# Altium PCB PCB_表决器_2021-10-19.pcbdoc
Units mm, origin at the board's own origin, x right, y up, seen from the top; angles counter-clockwise.
Board outline 75.95 x 43.78 mm, 2 copper layers (Top Layer, Bottom Layer); 33 components, 36 nets, 150 pads, 17 vias.
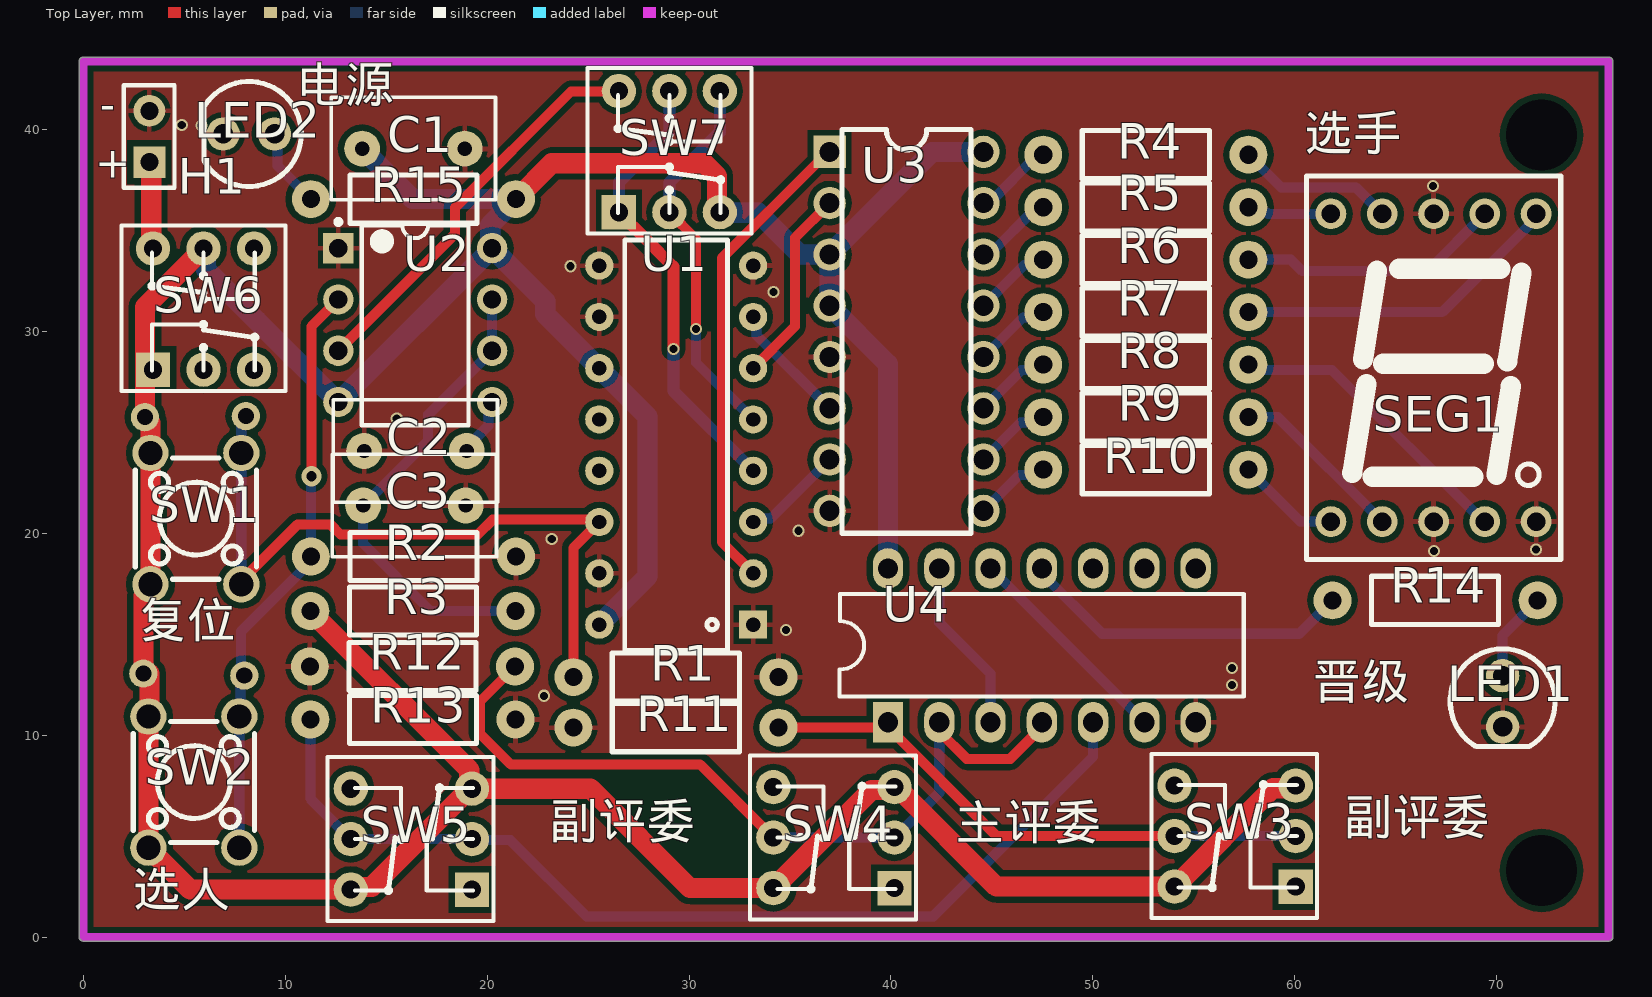
[diagram p0: Top Layer view]
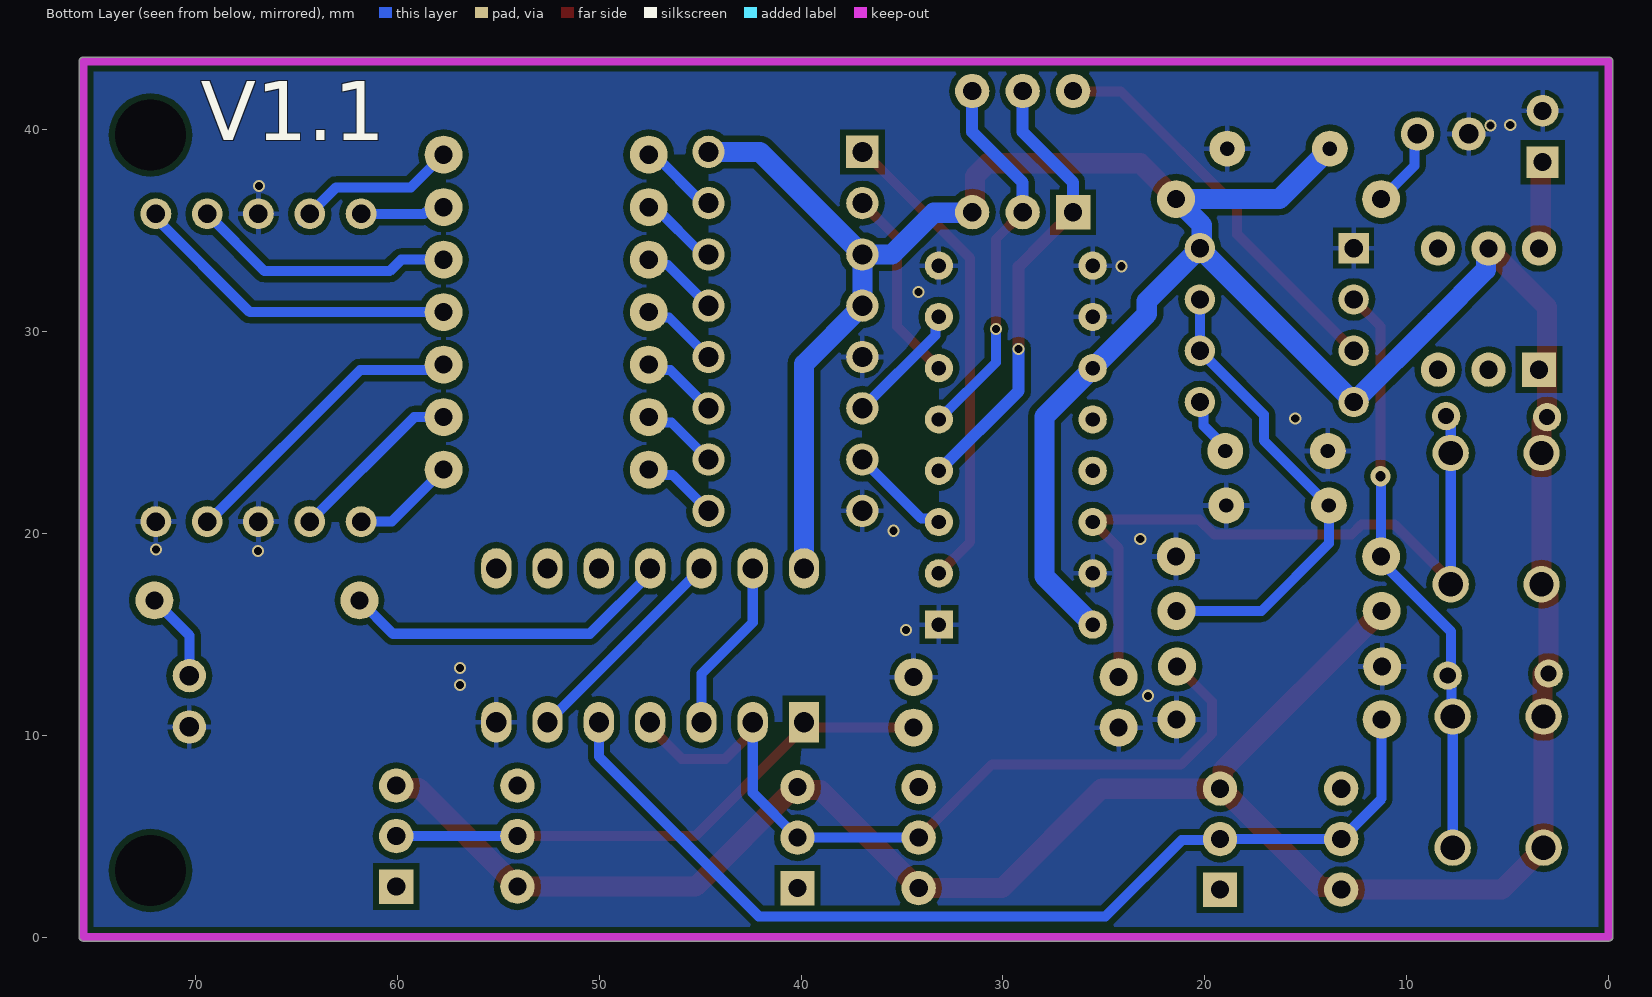
[diagram p1: Bottom Layer view, seen from below]

## Layer stack, top to bottom
Top Solder: solder mask 0.0102, Solder Resist, Dk 3.5
Top Layer: signal copper 0.0356
Dielectric1: dielectric 0.32, FR-4, Dk 4.8
Bottom Layer: signal copper 0.0356
Bottom Solder: solder mask 0.0102, Solder Resist, Dk 3.5

## Board outline
-0.2,0 -0.2,43.375 cw(c0,43.375) 0,43.575 75.55,43.575 cw(c75.55,43.375) 75.75,43.375 75.75,0 cw(c75.55,0) 75.55,-0.2 0,-0.2 cw(c0,0)

## Design rules (kind name [scope] priority, off if disabled: settings)
Clearance [All] p1: gap=0.3 ignorepadtopadclearanceinfootprint=TRUE except(0: Arc-Text Track-Text SMDPad-Text THPad-Text Via-Text Fill-Text Poly-Text Region-Text Text-Text Text-Hole)
ComponentClearance [All] p1 off: gap=0 collisioncheckmode=3 verticalgap=0 showdistances=FALSE
DiffPairsRouting [All] p1: maxlimit=0.254 minlimit=0.254 mostfreqgap=0.254 substack1={1671C4D1-2C51-4F67-87BD-DF8E1302070F} toplayer_{1671c4d1-2c51-4f67-87bd-df8e1302070f}_minwidth=0.381 toplayer_{1671c4d1-2c51-4f67-87bd-df8e1302070f}_maxwidth=0.381 toplayer_{1671c4d1-2c51-4f67-87bd-df8e1302070f}_prefwidth=0.381 bottomlayer_{1671c4d1-2c51-4f67-87bd-df8e1302070f}_minwidth=0.381 bottomlayer_{1671c4d1-2c51-4f67-87bd-df8e1302070f}_maxwidth=0.381 bottomlayer_{1671c4d1-2c51-4f67-87bd-df8e1302070f}_prefwidth=0.381 substack2={3B75E790-42CC-4F7A-B863-FC88317FD7D9} toplayer_{3b75e790-42cc-4f7a-b863-fc88317fd7d9}_minwidth=0.381 toplayer_{3b75e790-42cc-4f7a-b863-fc88317fd7d9}_maxwidth=0.381 toplayer_{3b75e790-42cc-4f7a-b863-fc88317fd7d9}_prefwidth=0.381 bottomlayer_{3b75e790-42cc-4f7a-b863-fc88317fd7d9}_minwidth=0.381 bottomlayer_{3b75e790-42cc-4f7a-b863-fc88317fd7d9}_maxwidth=0.381 bottomlayer_{3b75e790-42cc-4f7a-b863-fc88317fd7d9}_prefwidth=0.381 substack3={2F4237B4-239E-41A0-AF34-98E690AACAD4} toplayer_{2f4237b4-239e-41a0-af34-98e690aacad4}_minwidth=0.381 toplayer_{2f4237b4-239e-41a0-af34-98e690aacad4}_maxwidth=0.381 toplayer_{2f4237b4-239e-41a0-af34-98e690aacad4}_prefwidth=0.381 bottomlayer_{2f4237b4-239e-41a0-af34-98e690aacad4}_minwidth=0.381 bottomlayer_{2f4237b4-239e-41a0-af34-98e690aacad4}_maxwidth=0.381 bottomlayer_{2f4237b4-239e-41a0-af34-98e690aacad4}_prefwidth=0.381 substack4={1E66B78F-233F-4AC1-99FE-9E25E5123E1D} toplayer_{1e66b78f-233f-4ac1-99fe-9e25e5123e1d}_minwidth=0.381 toplayer_{1e66b78f-233f-4ac1-99fe-9e25e5123e1d}_maxwidth=0.381 toplayer_{1e66b78f-233f-4ac1-99fe-9e25e5123e1d}_prefwidth=0.381 bottomlayer_{1e66b78f-233f-4ac1-99fe-9e25e5123e1d}_minwidth=0.381 bottomlayer_{1e66b78f-233f-4ac1-99fe-9e25e5123e1d}_maxwidth=0.381 bottomlayer_{1e66b78f-233f-4ac1-99fe-9e25e5123e1d}_prefwidth=0.381 substack5={4320813C-2743-4AF9-94FB-DAB81B7D91AB} toplayer_{4320813c-2743-4af9-94fb-dab81b7d91ab}_minwidth=0.381 toplayer_{4320813c-2743-4af9-94fb-dab81b7d91ab}_maxwidth=0.381 toplayer_{4320813c-2743-4af9-94fb-dab81b7d91ab}_prefwidth=0.381 bottomlayer_{4320813c-2743-4af9-94fb-dab81b7d91ab}_minwidth=0.381 bottomlayer_{4320813c-2743-4af9-94fb-dab81b7d91ab}_maxwidth=0.381 bottomlayer_{4320813c-2743-4af9-94fb-dab81b7d91ab}_prefwidth=0.381 substack6={9AE5D4F9-CAB0-47CD-A39F-EDF1D98A47D7} toplayer_{9ae5d4f9-cab0-47cd-a39f-edf1d98a47d7}_minwidth=0.381 toplayer_{9ae5d4f9-cab0-47cd-a39f-edf1d98a47d7}_maxwidth=0.381 toplayer_{9ae5d4f9-cab0-47cd-a39f-edf1d98a47d7}_prefwidth=0.381 bottomlayer_{9ae5d4f9-cab0-47cd-a39f-edf1d98a47d7}_minwidth=0.381 bottomlayer_{9ae5d4f9-cab0-47cd-a39f-edf1d98a47d7}_maxwidth=0.381 bottomlayer_{9ae5d4f9-cab0-47cd-a39f-edf1d98a47d7}_prefwidth=0.381 toplayer_minwidth=0.381 toplayer_maxwidth=0.381 toplayer_prefwidth=0.381 bottomlayer_minwidth=0.381 bottomlayer_maxwidth=0.381 bottomlayer_prefwidth=0.381 substack7={C643A821-3D00-4CAF-8DDB-CDB80088F83D} toplayer_{c643a821-3d00-4caf-8ddb-cdb80088f83d}_minwidth=0.381 toplayer_{c643a821-3d00-4caf-8ddb-cdb80088f83d}_maxwidth=0.381 toplayer_{c643a821-3d00-4caf-8ddb-cdb80088f83d}_prefwidth=0.381 bottomlayer_{c643a821-3d00-4caf-8ddb-cdb80088f83d}_minwidth=0.381 bottomlayer_{c643a821-3d00-4caf-8ddb-cdb80088f83d}_maxwidth=0.381 bottomlayer_{c643a821-3d00-4caf-8ddb-cdb80088f83d}_prefwidth=0.381 substack8={C7AC0887-D30A-4DD7-9CA0-6FC6CFBC5628} toplayer_{c7ac0887-d30a-4dd7-9ca0-6fc6cfbc5628}_minwidth=0.381 toplayer_{c7ac0887-d30a-4dd7-9ca0-6fc6cfbc5628}_maxwidth=0.381 toplayer_{c7ac0887-d30a-4dd7-9ca0-6fc6cfbc5628}_prefwidth=0.381 bottomlayer_{c7ac0887-d30a-4dd7-9ca0-6fc6cfbc5628}_minwidth=0.381 bottomlayer_{c7ac0887-d30a-4dd7-9ca0-6fc6cfbc5628}_maxwidth=0.381 bottomlayer_{c7ac0887-d30a-4dd7-9ca0-6fc6cfbc5628}_prefwidth=0.381 substack9={87871970-CB08-4CB0-9993-037F3F7CD02E} toplayer_{87871970-cb08-4cb0-9993-037f3f7cd02e}_minwidth=0.381 toplayer_{87871970-cb08-4cb0-9993-037f3f7cd02e}_maxwidth=0.381 toplayer_{87871970-cb08-4cb0-9993-037f3f7cd02e}_prefwidth=0.381 bottomlayer_{87871970-cb08-4cb0-9993-037f3f7cd02e}_minwidth=0.381 bottomlayer_{87871970-cb08-4cb0-9993-037f3f7cd02e}_maxwidth=0.381 bottomlayer_{87871970-cb08-4cb0-9993-037f3f7cd02e}_prefwidth=0.381 substack10={5CED394E-343A-4A85-9D27-82AA802709EA} toplayer_{5ced394e-343a-4a85-9d27-82aa802709ea}_minwidth=0.381 toplayer_{5ced394e-343a-4a85-9d27-82aa802709ea}_maxwidth=0.381 toplayer_{5ced394e-343a-4a85-9d27-82aa802709ea}_prefwidth=0.381 bottomlayer_{5ced394e-343a-4a85-9d27-82aa802709ea}_minwidth=0.381 bottomlayer_{5ced394e-343a-4a85-9d27-82aa802709ea}_maxwidth=0.381 bottomlayer_{5ced394e-343a-4a85-9d27-82aa802709ea}_prefwidth=0.381 substack11={499D0663-916B-45B2-BDAF-5901DE3DF95E} toplayer_{499d0663-916b-45b2-bdaf-5901de3df95e}_minwidth=0.381 toplayer_{499d0663-916b-45b2-bdaf-5901de3df95e}_maxwidth=0.381 toplayer_{499d0663-916b-45b2-bdaf-5901de3df95e}_prefwidth=0.381 bottomlayer_{499d0663-916b-45b2-bdaf-5901de3df95e}_minwidth=0.381 bottomlayer_{499d0663-916b-45b2-bdaf-5901de3df95e}_maxwidth=0.381 bottomlayer_{499d0663-916b-45b2-bdaf-5901de3df95e}_prefwidth=0.381 substack12={DA8F04F5-34BF-456D-89EF-AED1E50DEB93} toplayer_{da8f04f5-34bf-456d-89ef-aed1e50deb93}_minwidth=0.381 toplayer_{da8f04f5-34bf-456d-89ef-aed1e50deb93}_maxwidth=0.381 toplayer_{da8f04f5-34bf-456d-89ef-aed1e50deb93}_prefwidth=0.381 bottomlayer_{da8f04f5-34bf-456d-89ef-aed1e50deb93}_minwidth=0.381 bottomlayer_{da8f04f5-34bf-456d-89ef-aed1e50deb93}_maxwidth=0.381 bottomlayer_{da8f04f5-34bf-456d-89ef-aed1e50deb93}_prefwidth=0.381 substack13={39F8033D-79E3-49DE-B103-996B2E850A14} toplayer_{39f8033d-79e3-49de-b103-996b2e850a14}_minwidth=0.381 toplayer_{39f8033d-79e3-49de-b103-996b2e850a14}_maxwidth=0.381 toplayer_{39f8033d-79e3-49de-b103-996b2e850a14}_prefwidth=0.381 bottomlayer_{39f8033d-79e3-49de-b103-996b2e850a14}_minwidth=0.381 bottomlayer_{39f8033d-79e3-49de-b103-996b2e850a14}_maxwidth=0.381 bottomlayer_{39f8033d-79e3-49de-b103-996b2e850a14}_prefwidth=0.381 substack14={68F1C6FC-B40A-4A37-B771-068DD1207AC1} toplayer_{68f1c6fc-b40a-4a37-b771-068dd1207ac1}_minwidth=0.381 toplayer_{68f1c6fc-b40a-4a37-b771-068dd1207ac1}_maxwidth=0.381 toplayer_{68f1c6fc-b40a-4a37-b771-068dd1207ac1}_prefwidth=0.381 bottomlayer_{68f1c6fc-b40a-4a37-b771-068dd1207ac1}_minwidth=0.381 bottomlayer_{68f1c6fc-b40a-4a37-b771-068dd1207ac1}_maxwidth=0.381 bottomlayer_{68f1c6fc-b40a-4a37-b771-068dd1207ac1}_prefwidth=0.381 substack15={08D4F847-0E3E-4780-9B1D-D9A1F908246D} toplayer_{08d4f847-0e3e-4780-9b1d-d9a1f908246d}_minwidth=0.381 toplayer_{08d4f847-0e3e-4780-9b1d-d9a1f908246d}_maxwidth=0.381 toplayer_{08d4f847-0e3e-4780-9b1d-d9a1f908246d}_prefwidth=0.381 bottomlayer_{08d4f847-0e3e-4780-9b1d-d9a1f908246d}_minwidth=0.381 bottomlayer_{08d4f847-0e3e-4780-9b1d-d9a1f908246d}_maxwidth=0.381 bottomlayer_{08d4f847-0e3e-4780-9b1d-d9a1f908246d}_prefwidth=0.381 substack16={5F9F11DE-8F00-4DF3-B7FC-A4F24491A138} toplayer_{5f9f11de-8f00-4df3-b7fc-a4f24491a138}_minwidth=0.381 toplayer_{5f9f11de-8f00-4df3-b7fc-a4f24491a138}_maxwidth=0.381 toplayer_{5f9f11de-8f00-4df3-b7fc-a4f24491a138}_prefwidth=0.381 bottomlayer_{5f9f11de-8f00-4df3-b7fc-a4f24491a138}_minwidth=0.381 bottomlayer_{5f9f11de-8f00-4df3-b7fc-a4f24491a138}_maxwidth=0.381 bottomlayer_{5f9f11de-8f00-4df3-b7fc-a4f24491a138}_prefwidth=0.381 substack17={66F0545B-EEFD-4E47-AE11-124B7897395C} toplayer_{66f0545b-eefd-4e47-ae11-124b7897395c}_minwidth=0.381 toplayer_{66f0545b-eefd-4e47-ae11-124b7897395c}_maxwidth=0.381 toplayer_{66f0545b-eefd-4e47-ae11-124b7897395c}_prefwidth=0.381 bottomlayer_{66f0545b-eefd-4e47-ae11-124b7897395c}_minwidth=0.381 bottomlayer_{66f0545b-eefd-4e47-ae11-124b7897395c}_maxwidth=0.381 bottomlayer_{66f0545b-eefd-4e47-ae11-124b7897395c}_prefwidth=0.381 substack18={E99DB6DF-13F7-4D84-9436-A55681B3F58B} toplayer_{e99db6df-13f7-4d84-9436-a55681b3f58b}_minwidth=0.381 toplayer_{e99db6df-13f7-4d84-9436-a55681b3f58b}_maxwidth=0.381 toplayer_{e99db6df-13f7-4d84-9436-a55681b3f58b}_prefwidth=0.381 bottomlayer_{e99db6df-13f7-4d84-9436-a55681b3f58b}_minwidth=0.381 bottomlayer_{e99db6df-13f7-4d84-9436-a55681b3f58b}_maxwidth=0.381 bottomlayer_{e99db6df-13f7-4d84-9436-a55681b3f58b}_prefwidth=0.381 maxuncoupledlength=12.7
Height [All] p1 off: minheight=0 maxheight=25.4 prefheight=12.7
PolygonConnect [All] p1: thpad.connectstyle=Relief thpad.reliefconductorwidth=0.254 thpad.reliefentries=4 thpad.polygonreliefangle="90 Angle" thpad.airgapwidth=0.254 smdpad.connectstyle=Relief smdpad.reliefconductorwidth=0.254 smdpad.reliefentries=4 smdpad.polygonreliefangle="90 Angle" smdpad.airgapwidth=0.254 via.connectstyle=Direct via.reliefconductorwidth=0.254 via.reliefentries=4 via.polygonreliefangle="90 Angle" via.airgapwidth=0.254
RoutingVias [All] p1: holewidth=0.5 width=0.6 viastyle="Through Hole" minholewidth=0.3 minwidth=0.3 maxholewidth=1 maxwidth=1
SolderMaskExpansion [All] p1: expansion=0.102 istentingtop=FALSE
Width [All] p1: maxlimit=2 minlimit=0.3 preferedwidth=1 substack1={1671C4D1-2C51-4F67-87BD-DF8E1302070F} substack2={3B75E790-42CC-4F7A-B863-FC88317FD7D9} substack3={2F4237B4-239E-41A0-AF34-98E690AACAD4} substack4={1E66B78F-233F-4AC1-99FE-9E25E5123E1D} substack5={4320813C-2743-4AF9-94FB-DAB81B7D91AB} substack6={9AE5D4F9-CAB0-47CD-A39F-EDF1D98A47D7} substack7={C643A821-3D00-4CAF-8DDB-CDB80088F83D} substack8={C7AC0887-D30A-4DD7-9CA0-6FC6CFBC5628} substack9={87871970-CB08-4CB0-9993-037F3F7CD02E} substack10={5CED394E-343A-4A85-9D27-82AA802709EA} substack11={499D0663-916B-45B2-BDAF-5901DE3DF95E} substack12={DA8F04F5-34BF-456D-89EF-AED1E50DEB93} substack13={39F8033D-79E3-49DE-B103-996B2E850A14} substack14={68F1C6FC-B40A-4A37-B771-068DD1207AC1} substack15={08D4F847-0E3E-4780-9B1D-D9A1F908246D} substack16={5F9F11DE-8F00-4DF3-B7FC-A4F24491A138} substack17={66F0545B-EEFD-4E47-AE11-124B7897395C} substack18={E99DB6DF-13F7-4D84-9436-A55681B3F58B}
27 further rules are at their usual default settings.

## Classes and differential pairs
component class Sheet_1_2021-10-25: C2 C3 H1 LED1 LED2 R1 R2 R3 R4 R5 R6 R7 R8 R9 R10 R11 R12 R13 R14 R15 SEG1 SW2 SW3 SW5 SW6 U1 U2 U3 U4

## Components (designator, comment, footprint, x,y, rotation, side; value= is the part's Value field where it differs from the comment)
C1 "104" RAD-0.2 16.35,39.05 r0 top (schematic designator C3)
C2 "104" RAD-0.2 16.45,24.075 r180 top
C3 "104" RAD-0.2 16.4,21.375 r0 top
H1 "HDR-F-2.54_1x2" HDR-F-2.54_1X2 3.275,39.65 r90 top
LED1 "LED-TH-5mm_R" LED-TH_BD5.0_RED 70.3,11.675 r0 top
LED2 "LED-TH-5mm_R" LED-TH_BD5.0_RED 8.2,39.775 r270 top (schematic designator LED1)
R1 "220" R_AXIAL-0.4 29.35,12.875 r0 top
R2 "10k" R_AXIAL-0.4 16.35,18.85 r180 top
R3 "10k" R_AXIAL-0.4 16.325,16.15 r0 top
R4 "220" R_AXIAL-0.4 52.625,38.75 r0 top
R5 "220" R_AXIAL-0.4 52.625,36.15 r0 top
R6 "220" R_AXIAL-0.4 52.625,33.55 r0 top
R7 "220" R_AXIAL-0.4 52.625,30.95 r0 top
R8 "220" R_AXIAL-0.4 52.625,28.35 r0 top
R9 "220" R_AXIAL-0.4 52.625,25.75 r0 top
R10 "220" R_AXIAL-0.4 52.625,23.15 r0 top
R11 "220" R_AXIAL-0.4 29.35,10.375 r0 top
R12 "220" R_AXIAL-0.4 16.3,13.4 r0 top
R13 "220" R_AXIAL-0.4 16.325,10.775 r180 top
R14 "220" R_AXIAL-0.4 66.95,16.675 r180 top
R15 "220" R_AXIAL-0.4 16.35,36.55 r0 top (schematic designator R4)
SEG1 "SEG-TH_0.56×1_Anode" LED-SEG-TH_10P-L12.6-W19.0-P2.54-S15.24-BL 66.875,28.2 r0 top
SW1 "复位" SW-TH_4P-L6.0-W6.0-P4.50-LS6.5 5.575,20.725 r90 top
SW2 "选择选手" SW-TH_4P-L6.0-W6.0-P4.50-LS6.5 5.475,7.675 r90 top
SW3 "副评委" "KFT DIP-8X8" 57.05,5 r90 top
SW4 "主评委" "KFT DIP-8X8" 37.175,4.925 r90 top
SW5 "副评委" "KFT DIP-8X8" 16.25,4.85 r90 top
SW6 "Comment" "KFT DIP-8X8" 5.95,31.1 r0 top
SW7 "Comment" "KFT DIP-8X8" 29.025,38.9 r0 top
U1 "HD74HC192P" DIP16 29.365,24.365 r90 top
U2 "NE555P" DIP-8_L9.8-W6.6-P2.54-LS7.6-BL 16.44,30.31 r270 top
U3 "CD4511BE" DIP-16_L19.8-W6.5-P2.54-LS7.6-BL 40.775,30 r270 top
U4 "XD74LS00" DIP-14_L20.0-W7.6-P2.54-LS7.6-BL 47.475,14.45 r0 top

## Footprints (in the part's own frame and the unit in brackets; to place one, negate y for a bottom-side part, rotate by r counter-clockwise, add the part's x,y. Pads: shape width x height; smd on the part's side, far side on the other; paste and mask are expansions set on the pad)
DIP16 [mil]
  rect 55x55 hole 28: 1(-350,-150)
  round 55 hole 28: 2(-250,-150) 3(-150,-150) 4(-50,-150) 5(50,-150) 6(150,-150) 7(250,-150) 8(350,-150) 9(350,150) 10(250,150) 11(150,150) 12(50,150) 13(-50,150) 14(-150,150) 15(-250,150) 16(-350,150)
  silkscreen extent -400,-100 400,100
DIP-8_L9.8-W6.6-P2.54-LS7.6-BL [mm]
  rect 1.5x1.5 hole 0.9: 1(-3.81,-3.81)
  round 1.5 hole 0.9: 2(-1.27,-3.81) 3(1.27,-3.81) 4(3.81,-3.81) 5(3.81,3.81) 6(1.27,3.81) 7(-1.27,3.81) 8(-3.81,3.81)
  silkscreen extent -5.23,-3.93 4.96,2.65
DIP-14_L20.0-W7.6-P2.54-LS7.6-BL [mm]
  rect 1.5x2 hole 1: 1(-7.62,-3.81)
  oval 1.5x2 hole 1: 2(-5.08,-3.81) 3(-2.54,-3.81) 4(0,-3.81) 5(2.54,-3.81) 6(5.08,-3.81) 7(7.62,-3.81) 8(7.62,3.81) 9(5.08,3.81) 10(2.54,3.81) 11(0,3.81) 12(-2.54,3.81) 13(-5.08,3.81) 14(-7.62,3.81)
  silkscreen extent -10.03,-2.53 10,2.54
DIP-16_L19.8-W6.5-P2.54-LS7.6-BL [mm]
  rect 1.6x1.6 hole 1: 1(-8.89,-3.81)
  round 1.6 hole 1: 2(-6.35,-3.81) 3(-3.81,-3.81) 4(-1.27,-3.81) 5(1.27,-3.81) 6(3.81,-3.81) 7(6.35,-3.81) 8(8.89,-3.81) 9(8.89,3.81) 10(6.35,3.81) 11(3.81,3.81) 12(1.27,3.81) 13(-1.27,3.81) 14(-3.81,3.81) 15(-6.35,3.81) 16(-8.89,3.81)
  silkscreen extent -10,-3.2 10,3.2
HDR-F-2.54_1X2 [mil]
  rect 62x62 hole 35: 1(-50,0)
  round 62 hole 35: 2(50,0)
  silkscreen extent -100,-49 100,50
"KFT DIP-8X8" [mm] "自锁开关，规格：8*8mm"
  rect 1.7x1.7 hole 0.9: 1(-2.5,-3)
  round 1.7 hole 0.9: 2(0,-3) 3(2.5,-3) 4(2.5,3) 5(0,3) 6(-2.5,3)
  silkscreen extent -4.06,-4.06 4.06,4.15, body extent -3.95,-3.95 4.05,4.05, height 13.1
LED-SEG-TH_10P-L12.6-W19.0-P2.54-S15.24-BL [mil]
  round 60 hole 36: 1(-200,-300) 2(-100,-300) 3(0,-300) 4(100,-300) 5(200,-300) 6(200,300) 7(100,300) 8(0,300) 9(-100,300) 10(-200,300)
  silkscreen extent -248,-374 248,374
LED-TH_BD5.0_RED [mil]
  round 65 hole 38: 1(0,50) 2(0,-50)
  silkscreen extent -102,-88 102,102
R_AXIAL-0.4 [mil]
  round 74 hole 35.4: 1(-200,0) 2(200,0)
  silkscreen extent -124,-47 124,47
RAD-0.2 [mil]
  round 70 hole 28: 1(100,0) 2(-100,0)
  silkscreen extent -160,-100 160,100
SW-TH_4P-L6.0-W6.0-P4.50-LS6.5 [mm]
  round 1.8 hole 1.2: 1(-3.25,2.25) 2(3.25,2.25) 3(-3.25,-2.25) 4(3.25,-2.25)
  silkscreen extent -3,-3 3,3

## Part data
C1 C3: library part 103

## Free pads (board coordinates)
  round 0.1 hole 3.5: 17(72.225,3.3) 18(72.225,39.725)
  round 1.4 hole 0.8: ""(2.975,13.05) ""(3.05,25.75) ""(7.975,12.95) ""(8.05,25.8)

## Via types
v1: diameter 0.6, hole 0.4, Top Layer to Bottom Layer, 16 vias
v2: diameter 1, hole 0.5, Top Layer to Bottom Layer, 1 vias

## Nets (pads, with @x,y where several pads share a name; then routed paths per layer and width w, separated by ;. In a path a pad name is that pad's centre, name@x,y a point inside that pad or via, vN(x,y) a via of type N, cw(c..) or ccw(c..) an arc to the next point about the centre after c; other vN are vias at no path point)
+5V: C1.2 pad.@2.975,13.05 pad.@3.05,25.75 R3.1 R15.2 SW1.1 SW1.2 SW2.1 SW2.2 SW3.3 SW3.6 SW4.3 SW4.6 SW5.3 SW5.6 SW6.5 SW7.3 U1.11 U1.16 U2.4 U2.8 U3.3 U3.4 U3.16 U4.14 | length 212.1
  Top Layer w1: pad.@2.975,13.05 3.16,13.05 2.975,13.235 2.975,16.909 3.325,17.259 SW1.1 ; pad.@3.05,25.75 3.05,31.2 SW6.5 ; pad.@3.275,13.05 3.275,10.975 SW2.2 SW2.1 5.3,2.35 SW5.6 13.384,2.484 14.284,2.484 19.15,7.35 SW5.3 ; SW1.1@3.325,17.675 SW1.2 pad.@3.325,25.475 ; R3.1 19.116,8.279 19.116,7.484 SW5.3 ; R15.2 23.205,38.325 30.75,38.325 31.391,37.684 31.391,36.034 SW7.3 ; SW3.3 59.916,7.366 58.916,7.366 SW3.6 45.225,2.5 40.3,7.425 SW4.3 40.041,7.291 39.041,7.291 SW4.6 30.05,2.425 25.125,7.35 SW5.3
  Bottom Layer w1: SW6.5 6.084,33.966 6.084,33.046 8.6,30.53 U2.4 U2.8 ; C1.2 16.31,36.55 R15.2 20.154,35.274 20.154,34.216 U2.8 ; U1.16 27.95,17.87 27.95,25.78 U1.11 22.875,30.855 22.875,31.495 U2.8 ; SW7.3 31.55,35.875 33.425,35.875 35.49,33.81 U3.3 ; U4.14 39.855,28.381 U3.4 U3.3 ; U3.16 42.045,38.89 U3.3
C2_2: C2.2 U2.5 | length 2.9
  Bottom Layer w0.5: C2.2 18.99,24.256 20.059,25.324 20.059,26.309 U2.5
GND: C1.1 C2.1 C3.1 H1.2 LED1.2 LED2.2 R1.2 R2.1 R11.1 R12.1 R13.1 SEG1.3 SEG1.5 SEG1.8 U1.1 U1.8 U1.9 U1.10 U1.15 U2.1 U3.5 U3.8 U4.7
  other v1: 22.825,11.95 56.9,12.475 56.9,13.325 34.8,15.2 66.9,19.125 71.95,19.2 23.2,19.725 35.425,20.125 15.525,25.675 34.175,31.95 24.125,33.225 66.85,37.2 5.85,40.2 4.875,40.225
NetR15: LED2.1 R15.1 | length 4
  Bottom Layer w0.5: LED2.1 9.621,39.624 9.621,38.2 R15.1
OUT: U2.3 | length 20
  Top Layer w0.5: U2.3 18.4,34.81 18.4,36.125 24.15,41.875 26.55,41.875
R1_1: pad.@8.05,25.8 R1.1 SW1.3 SW1.4 U1.14 | length 36.2
  Top Layer w0.5: SW1.3 7.825,17.65 10.6,20.425 12.25,20.425 12.739,19.936 19.536,19.936 20.275,20.675 25.435,20.675 U1.14 24.27,19.27 R1.1
  Bottom Layer w0.5: SW1.3 SW1.4 pad.@7.825,25.8
R2_2: pad.@7.975,12.95 R2.2 SW2.3 SW2.4 U2.2 | length 29.2
  Top Layer w0.5: v2(11.3,22.825) 11.3,30.25 U2.2
  Bottom Layer w0.5: SW2.3 SW2.4 7.776,10.976 7.776,12.508 7.803,12.534 7.803,12.872 7.725,12.95 7.803,13.028 7.803,15.128 11.27,18.595 R2.2 ; R2.2@11.285,18.865 11.285,22.81 v2(11.3,22.825)
R3_2: C3.2 R3.2 U2.6 U2.7 | length 23.7
  Bottom Layer w0.5: U2.7 U2.6 17.082,25.872 17.082,24.597 C3.2 13.86,19.49 17.2,16.15 R3.2
R4_1: R4.1 U3.15 | length 4
  Bottom Layer w0.5: U3.15 44.865,36.35 47.265,38.75 R4.1
R4_2: R4.2 SEG1.9 | length 8.4
  Bottom Layer w0.5: R4.2 59.323,37.132 63.023,37.132 63.667,36.488 SEG1.9@64.706,35.449
R5_1: R5.1 U3.14 | length 3.9
  Bottom Layer w0.5: U3.14 44.883,33.81 47.222,36.15 R5.1
R5_2: R5.2 SEG1.10 | length 4.2
  Bottom Layer w0.5: R5.2 57.969,35.886 58.622,35.886 58.688,35.82 SEG1.10
R6_1: R6.1 U3.13 | length 3.9
  Bottom Layer w0.5: U3.13 46.601,33.286 47.281,33.286 R6.1
R6_2: R6.2 SEG1.7 | length 13.1
  Bottom Layer w0.5: R6.2 59.81,33.55 60.377,32.983 66.578,32.983 SEG1.7
R7_1: R7.1 U3.12 | length 3.9
  Bottom Layer w0.5: U3.12 46.541,30.686 47.281,30.686 R7.1
R7_2: R7.2 SEG1.6 | length 16.3
  Bottom Layer w0.5: R7.2 67.3,30.95 SEG1.6@72.062,35.712
R8_1: R8.1 U3.11 | length 3.9
  Bottom Layer w0.5: U3.11 46.481,28.086 47.281,28.086 R8.1
R8_2: R8.2 SEG1.4 | length 14.9
  Bottom Layer w0.5: R8.2 57.965,28.09 61.835,28.09 SEG1.4@69.38,20.545
R9_1: R9.1 U3.10 | length 3.8
  Bottom Layer w0.5: U3.10 46.421,25.486 47.281,25.486 R9.1
R9_2: R9.2 SEG1.2 | length 8.8
  Bottom Layer w0.5: R9.2 59.165,25.75 SEG1.2
R10_1: R10.1 U3.9 | length 3.8
  Bottom Layer w0.5: U3.9 46.361,22.886 47.281,22.886 R10.1
R10_2: R10.2 SEG1.1 | length 5.2
  Bottom Layer w0.5: R10.2 60.275,20.58 SEG1.1
R11_2: R11.2 SW3.2 SW3.5 U4.1 | length 28.5
  Top Layer w0.5: R11.2 39.59,10.375 U4.1 39.855,10.39 45.245,5 SW3.5
  Bottom Layer w0.5: U4.1@39.855,10.39 U4.1 ; SW3.5 SW3.2
R12_2: R12.2 SW4.2 SW4.5 U4.2 U4.4 | length 40.3
  Top Layer w0.5: R12.2 19.65,11.67 19.65,10.075 21.175,8.55 30.55,8.55 SW4.5 ; U4.2 42.395,10.179 43.749,8.825 45.91,8.825 47.475,10.39 U4.4
  Bottom Layer w0.5: SW4.5 SW4.2 42.395,7.145 U4.2
R13_2: R13.2 SW5.2 SW5.5 U4.5 | length 50.3
  Top Layer w0.5: U4.5@50.015,10.39 U4.5
  Bottom Layer w0.5: R13.2 11.245,6.855 SW5.5 SW5.2 19.3,4.8 21.15,4.8 24.925,1.025 42.1,1.025 50.015,8.94 U4.5
R14_1: LED1.1 R14.1 | length 4.4
  Bottom Layer w0.5: LED1.1 70.3,14.945 R14.1
R14_2: R14.2 U4.11 | length 16.6
  Bottom Layer w0.5: U4.11 47.475,18.01 50.46,15.025 60.22,15.025 R14.2
U1_2: U1.2 U3.1 | length 23.8
  Top Layer w0.5: U1.2 31.625,19.565 31.625,33.625 36.34,38.34 36.415,38.34 U3.1
U1_3: U1.3 U3.7 | length 5.1
  Bottom Layer w0.5: U1.3 33.347,20.727 34.041,20.727 U3.7
U1_4: SW7.1 U1.4 | length 22.6
  Top Layer w0.6: SW7.1 27.875,34.55 29.225,33.2 v1(29.225,29.125)
  Bottom Layer w0.6: SW7.1 26.525,37.375 29.025,39.875 29.025,41.9 ; v1(29.225,29.125) 29.225,27.045 U1.4
U1_5: SW7.2 U1.5 | length 19
  Top Layer w0.5: SW7.2 30.35,34.575 v1(30.35,30.125)
  Bottom Layer w0.5: v1(30.35,30.125) 30.35,28.46 U1.5
  Bottom Layer w0.6: SW7.2 29.025,37.375 31.525,39.875 31.525,41.9
U1_6: U1.6 U3.2 | length 9.7
  Top Layer w0.5: U1.6 35.25,30.25 35.25,34.635 U3.2
U1_7: U1.7 U3.6 | length 6.1
  Bottom Layer w0.5: U1.7 33.347,30.543 33.347,29.809 U3.6
U4_3: U4.3 U4.13 | length 8.7
  Bottom Layer w0.5: U4.13 42.395,15.58 44.935,13.04 U4.3
U4_6: U4.6 U4.12 | length 10.8
  Bottom Layer w0.5: U4.12 U4.6
Vcc: H1.1 SW6.6 | length 4.4
  Top Layer w1: H1.1 3.363,38.293 3.363,34.188 SW6.6
pads on no net: SW3.1 SW3.4 SW4.1 SW4.4 SW5.1 SW5.4 SW6.1 SW6.2 SW6.3 SW6.4 SW7.4 SW7.5 SW7.6 U1.12 U1.13 U4.8 U4.9 U4.10

## Polygon pours and split planes (outlines as drawn)
GND on Bottom Layer "NONET_L-01_P-001" (solid, remove dead copper, pour order 0): 75.55,43.375 75.55,0 0,0 0,43.375
GND on Top Layer "NONET_L-01_P-001" (solid, remove dead copper, pour order 1): 0,43.375 0,0 75.55,0 75.55,43.375

## Keep-outs
Keep-Out Layer:
  lines w0.4: 0,0 0,43.375 75.55,43.375 75.55,0 0,0

## Other copper
Bottom Layer:
  pour cut-out: 39.855,10.64 40.175,7.425 42.395,10.64
  pour cut-out: 33.17,31.375 36.965,26.19 36.965,23.64 33.17,21.215
  pour cut-out: 57.705,25.749 57.705,23.15 59.1,22.35 61.795,20.58 64.334,20.58
  pour cut-out: 44.585,38.89 44.726,38.75 47.405,38.75 47.405,23.29 47.545,23.15 45.505,21.11 44.585,21.11

## Silkscreen, mask and mechanical layers (free items; w line width, h text height)
Top Overlay:
  text "-" at 1.571,41.633 h1.52 r180
  text "电源" at 10.6,40.775 h3
  text "选手" at 60.5,38.383 h3
  text "+" at 0.604,37.6 h1.52
  text "复位" at 2.75,14.247 h3
  text "晋级" at 60.9,11.197 h3
  text "副评委" at 62.45,4.505 h3
  text "副评委" at 23.1,4.305 h3
  text "主评委" at 43.203,4.247 h3
  text "选人" at 2.478,0.942 h3
Bottom Overlay:
  text "V1.1" at 69.725,38.5 h5